# EAGLE board 9volt_rail (EAGLE 7.0.0)
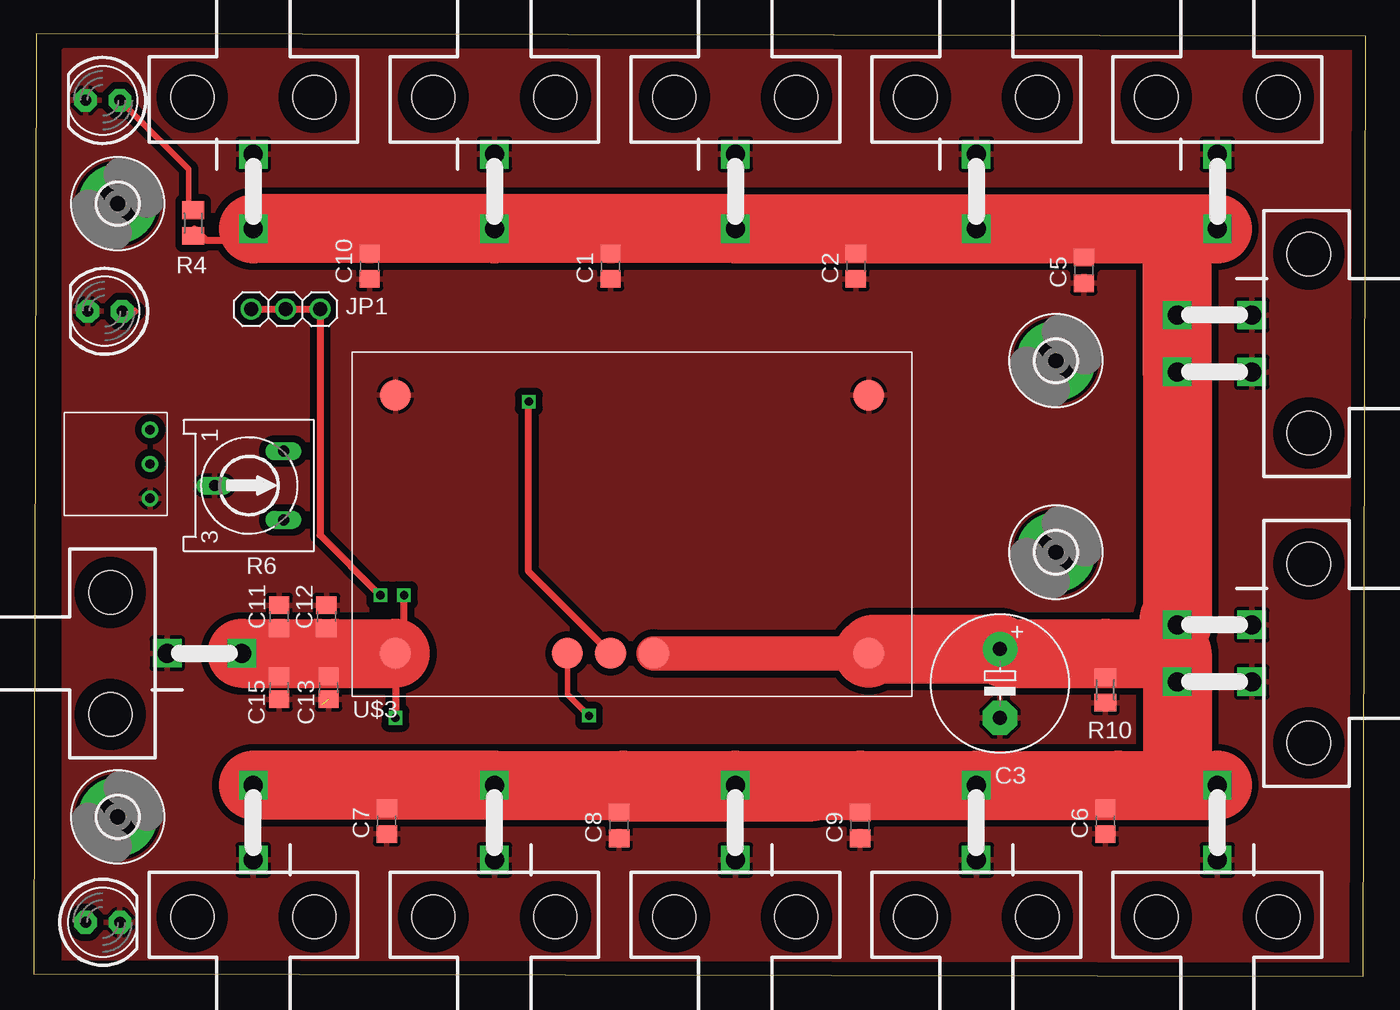
[diagram p0: board, top side]
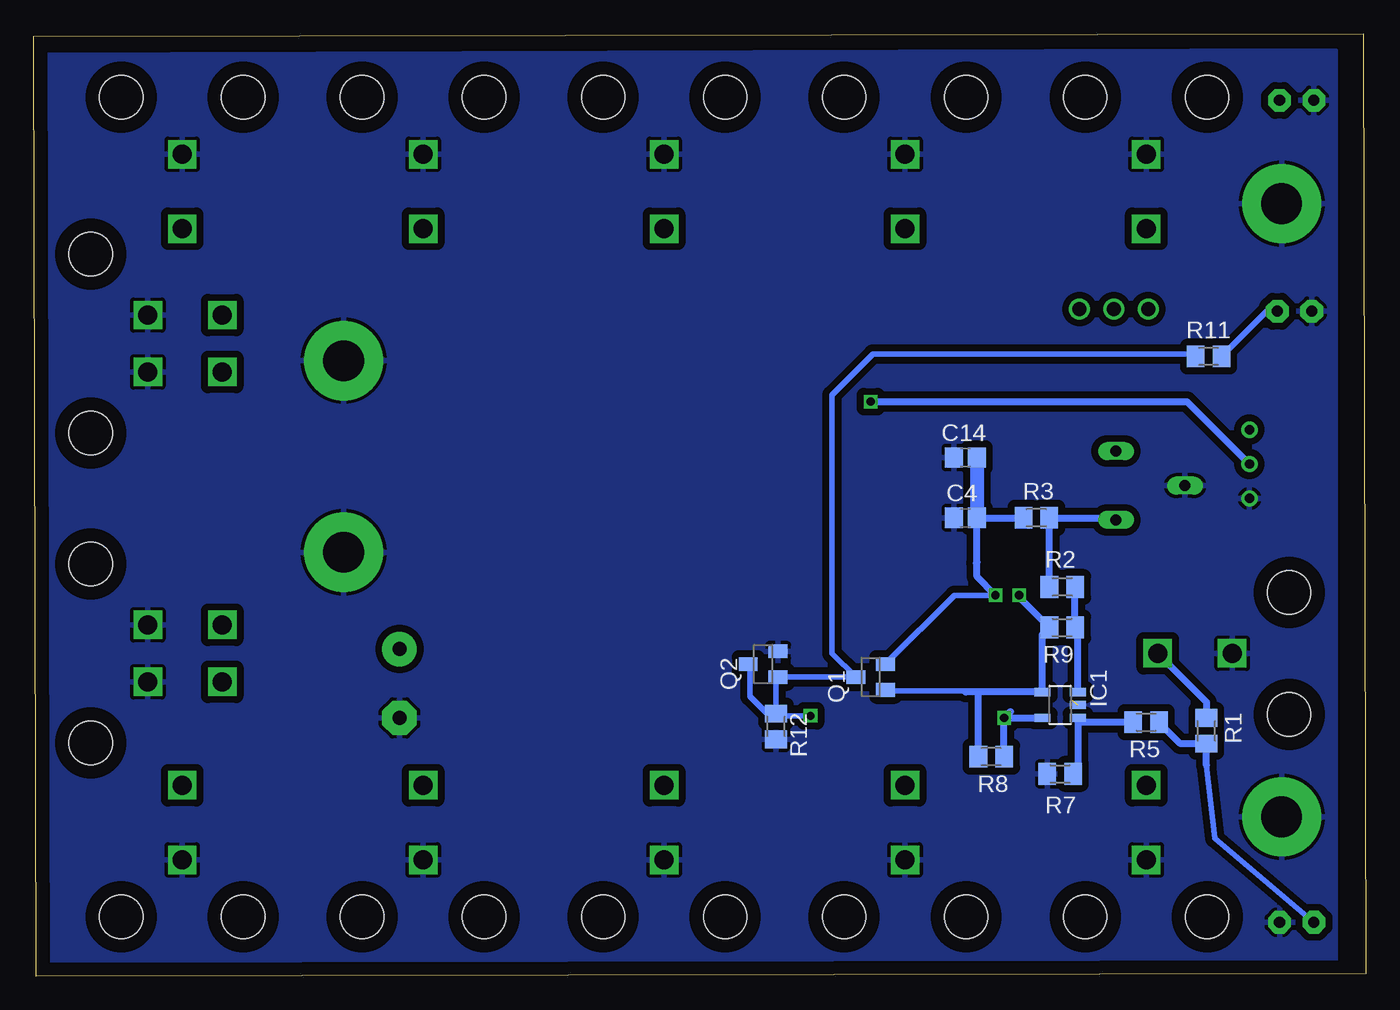
[diagram p1: board, bottom side, seen from below]

Size 98.25 x 69.52 mm. Coordinates in mm from the lower left corner, seen from the top.
Outline: 0,0.16 98.1,0 98.25,69.36 0.16,69.52 0,0.16
Copper layers (1*16): Top 0.035mm / dielectric 1.5mm / Bottom 0.035mm
Design rules "default": minimum track width 10mil, minimum drill 24mil, track to track 8mil, track to pad 8mil, pad to pad 8mil, via to via 8mil, smd to smd 8mil, copper to edge 40mil, drill to drill 8mil, minimum pad ring 10mil, minimum via ring 8mil, stop-mask expansion 4mil, vias tented up to drill 0mil, thermal gap 10mil
Net classes: 0 default: width 2.54 mm, drill 0.508 mm, clearance 0.254 mm

## Footprints (pad centres in the part's own frame; a part is rotated, then mirrored left to right if it is on the bottom)
C0805 = smd 1.3 x 1.5: 1 -0.95,0; 2 0.95,0
E5-10,5 = drill 1.016 pad 2.54: + -2.54,0 | drill 1.016 pad 2.54 octagon: - 2.54,0
C0805' = smd 1.3 x 1.5: 1 -0.85,0; 2 0.85,0
3,0-PAD = drill 3 pad 5.842: B3,0 0,0
DBV-R-PDSO-G5 = smd 0.6 x 1.2: 1 -0.95,-1.306; 2 0,-1.306; 3 0.95,-1.306; 4 0.95,1.306; 5 -0.95,1.306
1X03 = drill 1.016: 1 -2.54,0; 2 0,0; 3 2.54,0
5569-2 = drill 1.4 square: 1 0,0; 2 0,5.5 | hole 3.2: 4.5,-4.2; -4.5,-4.2
5569-4 = drill 1.4 square: 1 2.1,0; 2 -2.1,0; 3 2.1,5.5; 4 -2.1,5.5 | hole 3.2: 6.6,-4.2; -6.6,-4.2
SOT23 = smd 1 x 1.4: 1 -0.95,-1.1; 2 0.95,-1.1; 3 0,1.1
M0805 = smd 1.3 x 1.6: 1 -0.95,0; 2 0.95,0
RS3 = drill 0.813 long: A -2.54,2.54; E 2.54,2.54; S 0,-2.54
PTN78020-SND = smd 2.286 x 2.286: 1 -17.462,9.525; 2 -17.462,-9.525; 3 -4.763,-9.525; 4 -1.587,-9.525; 5 1.587,-9.525; 6 17.462,-9.525; 7 17.462,9.525
3310-001-TH = drill 0.7: 1 2.54,0; 2 0,0; 3 -2.54,0
LED5MM = drill 0.813 pad 1.676 octagon: A -1.27,0; K 1.27,0

## Placement (x,y rotation side)
C1  [C0805]  42.55,52.39 90 top
C2  [C0805]  60.64,52.39 90 top
C3  330uF  [E5-10,5]  71.28,21.59 270 top
C4  2.2uF  [C0805']  29.53,33.81 180 bottom
C5  [C0805]  77.47,52.07 90 top
C6  [C0805]  79.06,11.43 90 top
C7  [C0805]  26.04,11.43 90 top
C8  [C0805]  43.18,11.11 90 top
C9  [C0805]  60.96,11.11 90 top
C10  [C0805]  24.77,52.39 90 top
C11  2.2uF  [C0805']  18.1,26.51 90 top
C12  2.2uF  [C0805']  21.59,26.51 90 top
C13  2.2uF  [C0805']  21.75,21.27 270 top
C14  2.2uF  [C0805']  29.53,38.26 180 bottom
C15  2.2uF  [C0805']  18.1,21.27 270 top
H1  MOUNT-PAD-ROUND3.0  [3,0-PAD]  75.41,31.27 0 top
H2  MOUNT-PAD-ROUND3.0  [3,0-PAD]  6.19,56.99 0 top
H3  MOUNT-PAD-ROUND3.0  [3,0-PAD]  6.19,11.75 0 top
H4  MOUNT-PAD-ROUND3.0  [3,0-PAD]  75.41,45.4 0 top
IC1  TL331  [DBV-R-PDSO-G5]  22.54,20 90 bottom
JP1  [1X03]  18.57,49.21 180 top
PL1  [5569-2]  16.19,8.57 0 top
PL2  [5569-2]  33.97,8.57 0 top
PL3  [5569-2]  51.75,8.57 0 top
PL4  [5569-2]  69.53,8.57 0 top
PL5  [5569-2]  51.75,60.64 180 top
PL6  [5569-2]  87.31,8.57 0 top
PL7  [5569-2]  87.31,60.64 180 top
PL8  [5569-2]  69.53,60.64 180 top
PL9  [5569-2]  33.97,60.64 180 top
PL10  [5569-2]  16.19,60.64 180 top
PL11  [5569-4]  89.85,23.81 90 top
PL12  [5569-2]  9.84,23.81 270 top
PL13  [5569-4]  89.85,46.67 90 top
Q1  BSS84  [SOT23]  36.51,22.07 90 bottom
Q2  BSS123  [SOT23]  44.45,23.02 90 bottom
R1  [M0805]  11.75,18.1 270 bottom
R2  [M0805]  22.38,28.71 0 bottom
R3  [M0805]  24.29,33.81 0 bottom
R4  [M0805]  11.75,55.56 90 top
R5  [M0805]  16.19,18.73 180 bottom
R6  [RS3]  15.88,36.2 270 top
R7  [M0805]  22.54,14.92 180 bottom
R8  [M0805]  27.62,16.19 0 bottom
R9  [M0805]  22.38,25.72 180 bottom
R10  [M0805]  79.06,21.11 270 top
R11  [M0805]  11.59,45.72 0 bottom
R12  [M0805]  43.5,18.41 270 bottom
U$3  PTH78020-SMD  [PTN78020-SND]  44.13,33.34 0 top
U$4  3310-001  [3310-001-TH]  8.57,37.78 90 top
VCC1  [LED5MM]  5.08,3.97 0 top
VCC2  [LED5MM]  5.08,64.61 180 top
VCC3  [LED5MM]  5.24,49.05 180 top

## Library data of the parts
C1-C3 C5-C10 = rcl
C4 C11-C15 JP1 R1-R5 R7-R12 VCC1-VCC3 = adafruit
H1-H4 = holes
IC1 = linear
PL1-PL13 = con-molex-2
Q1 Q2 = transistor-small-signal
R6 = pot
U$3 = PTN78020
U$4 = 3310-001

## Nets
GND: C1.1 C2.1 C3.- C4.2 C5.1 C6.1 C7.1 C8.1 C9.1 C10.1 C11.2 C12.2 C13.2 C14.2 C15.2 H1.B3,0 H2.B3,0 H3.B3,0 H4.B3,0 IC1.2 PL1.1 PL2.1 PL3.1 PL4.1 PL5.1 PL6.1 PL7.1 PL8.1 PL9.1 PL10.1 PL11.1 PL11.2 PL12.1 PL13.1 PL13.2 Q2.2 R6.S R7.2 R10.2 R12.2 U$3.1 U$3.7 U$4.3 VCC1.K VCC2.K VCC3.K
N$1: C1.2 C2.2 C3.+ C5.2 C6.2 C7.2 C8.2 C9.2 C10.2 PL1.2 PL2.2 PL3.2 PL4.2 PL5.2 PL6.2 PL7.2 PL8.2 PL9.2 PL10.2 PL11.3 PL11.4 PL13.3 PL13.4 R4.1 R10.1 U$3.5 U$3.6
N$2: IC1.4 JP1.1 JP1.2 JP1.3 Q1.1 R8.1 R9.2
N$3: R1.2 R5.1 VCC1.A
N$4: IC1.3 R2.2 R9.1
N$5: Q1.3 Q2.1 R11.1 R12.1
N$6: R2.1 R3.2 R6.E
N$7: IC1.1 R5.2 R7.1
N$8: R11.2 VCC3.A
N$9: R4.2 VCC2.A
N$10: Q2.3 U$3.3
N$12: U$3.4 U$4.2
VCC: C4.1 C11.1 C12.1 C13.1 C14.1 C15.1 IC1.5 PL12.2 Q1.2 R1.1 R3.1 R8.2 U$3.2

## Tracks (layer width: path | path; a pad name or v marks a point on that pad's centre or on a via)
GND  (1 unrouted)
  pour Top (isolate 0.508): 2.22,68.26 99.22,68.26 99.22,0.95 2.22,0.95
  pour Bottom (isolate 0.508): 2.22,68.26 2.22,0.79 98.9,0.48 98.9,67.95
N$1
  Top 0.508: R4.1 11.85,55.14 12.7,54.29 16.83,54.29 16.19,54.93 PL10.2 | C9.2 60.96,14.07 | C7.2 25.72,12.7 25.72,13.65 26.14,14.07 26.35,14.07 | C8.2 43.5,12.38 43.5,14.07 | C6.2 80.01,13.33 80.01,14.07 | C10.2 24.77,55.14 | C1.2 42.55,55.14 | C2.2 60.64,55.14 | C5.2 77.79,53.34 77.79,55.14 | 78.74,25.91 PL11.3 84.35,23.81 | R10.1 79.06,23.81
  Top 2.54: U$3.5 U$3.6
  Top 5.08: 43.5,14.07 PL2.2 26.35,14.07 PL1.2 | 43.5,14.07 PL3.2 60.96,14.07 PL4.2 80.01,14.07 PL6.2 84.35,14.07 PL11.4 84.35,23.81 79.06,23.81 71.6,23.81 C3.+ 61.91,24.13 U$3.6 | PL10.2 24.77,55.14 PL9.2 42.55,55.14 PL5.2 60.64,55.14 PL8.2 77.79,55.14 PL7.2 84.35,55.14 PL13.3 PL13.4 PL11.3 84.35,26.35 84.14,26.35 | 43.5,14.07 43.6,13.97 57.47,13.97
N$2  (via drill 0.6)
  Top 0.508: JP1.3 JP1.2 JP1.1 21.11,32.54 v25.56,28.1
  Bottom 0.406: 29.52,20.95 29.52,21.02 35.41,21.02 Q1.1
  Bottom 0.508: 28.57,20.95 IC1.4 23.85,25.2 R9.2 | 28.57,20.95 29.52,20.95 | R9.2 23.33,26.03 | v25.56,28.1 25.56,27.94 R9.2 | R8.1 28.57,20.95
N$3
  Bottom 0.406: 11.75,15.56 11.11,10.16 VCC1.A
  Bottom 0.508: 11.75,15.56 R1.2 13.66,17.15 R5.1
N$4
  Bottom 0.508: IC1.3 21.24,25.52 R9.1 R2.2
N$5
  Bottom 0.406: R12.1 43.5,21.92 Q2.1 Q1.3 39.37,23.82 39.37,42.86 36.35,45.88 16.99,45.88 16.35,45.88 12.7,45.88 R11.1
N$6
  Bottom 0.508: R2.1 23.33,33.81 | 23.33,33.81 R3.2 | 23.33,33.81 18.57,33.81 R6.E
N$7
  Bottom 0.508: R5.2 20.92,18.73 IC1.1 21.24,15.28 R7.1
N$8
  Top 0.508: 7.46,49.06 VCC3.A
  Bottom 0.406: R11.2 7.3,49.05 VCC3.A
N$9
  Top 0.406: 11.43,56.83 11.43,59.53 VCC2.A
  Top 0.508: R4.2 11.43,56.83
N$10  (via drill 0.6)
  Top 0.406: v40.96,19.21 39.37,20.8 U$3.3
  Bottom 0.406: Q2.3 45.4,22.87 45.4,20.64 43.97,19.21 v40.96,19.21
N$12  (via drill 0.6)
  Top 0.508: U$3.4 36.51,29.84 v36.51,42.39
  Bottom 0.508: v36.51,42.39 13.18,42.39 U$4.2
VCC  (via drill 0.6)
  Top 0.508: v26.67,19.05 U$3.2 27.3,24.45 v27.3,28.1
  Top 1.016: C15.1 18.57,23.5 18.26,23.81 | C11.1 18.1,23.97 17.94,23.81 | C12.1 21.59,24.45 20.95,23.81 | C13.1 22.23,23.81
  Top 5.08: PL12.2 17.94,23.81 18.26,23.81 20.95,23.81 22.23,23.81 U$3.2
  Bottom 0.406: Q1.2 30.33,28.1 v27.3,28.1
  Bottom 0.508: PL12.2 11.75,20.22 R1.1 | PL12.2 15.24,23.91 | 15.34,23.61 PL12.2 | v26.67,19.05 IC1.5 | 26.19,19.53 v26.67,19.05 | R3.1 C4.1 28.68,30.54 | 28.73,30.48 28.68,30.54 | R8.2 v26.67,19.05 | v27.3,28.1 28.68,29.47 28.68,30.54
  Bottom 1.016: C14.1 C4.1